# Altium PCB 轨道灯6W.PcbDoc
Units mm, origin at the board's own origin, x right, y up, seen from the top; angles counter-clockwise.
Board outline 40 x 40 mm, 2 copper layers (Top Layer, Bottom Layer); 6 components, 6 nets, 16 pads, 0 vias.
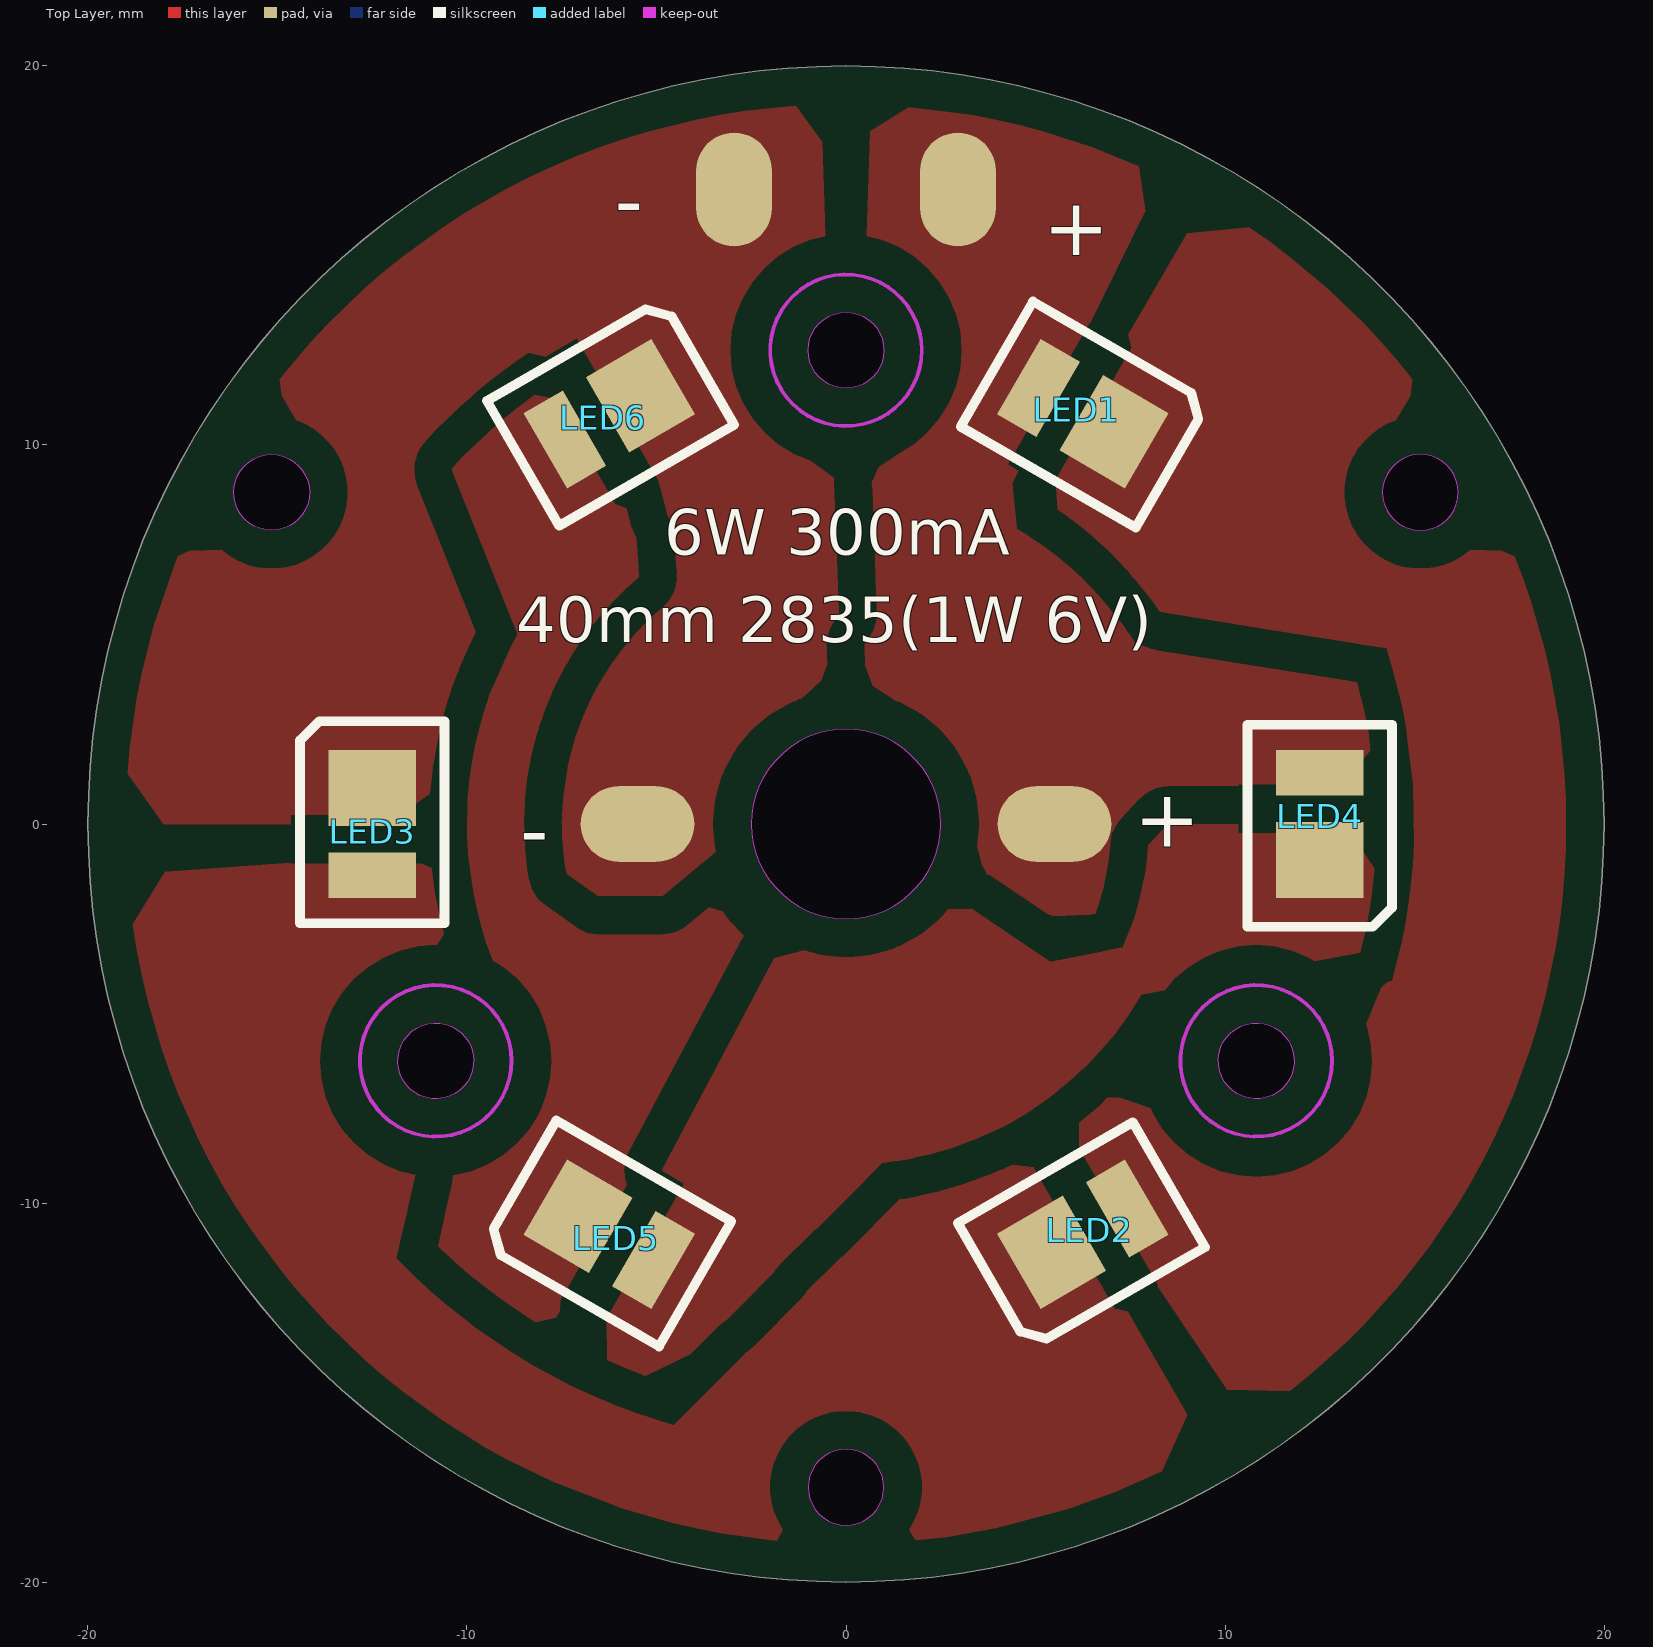
[diagram p0: Top Layer view]
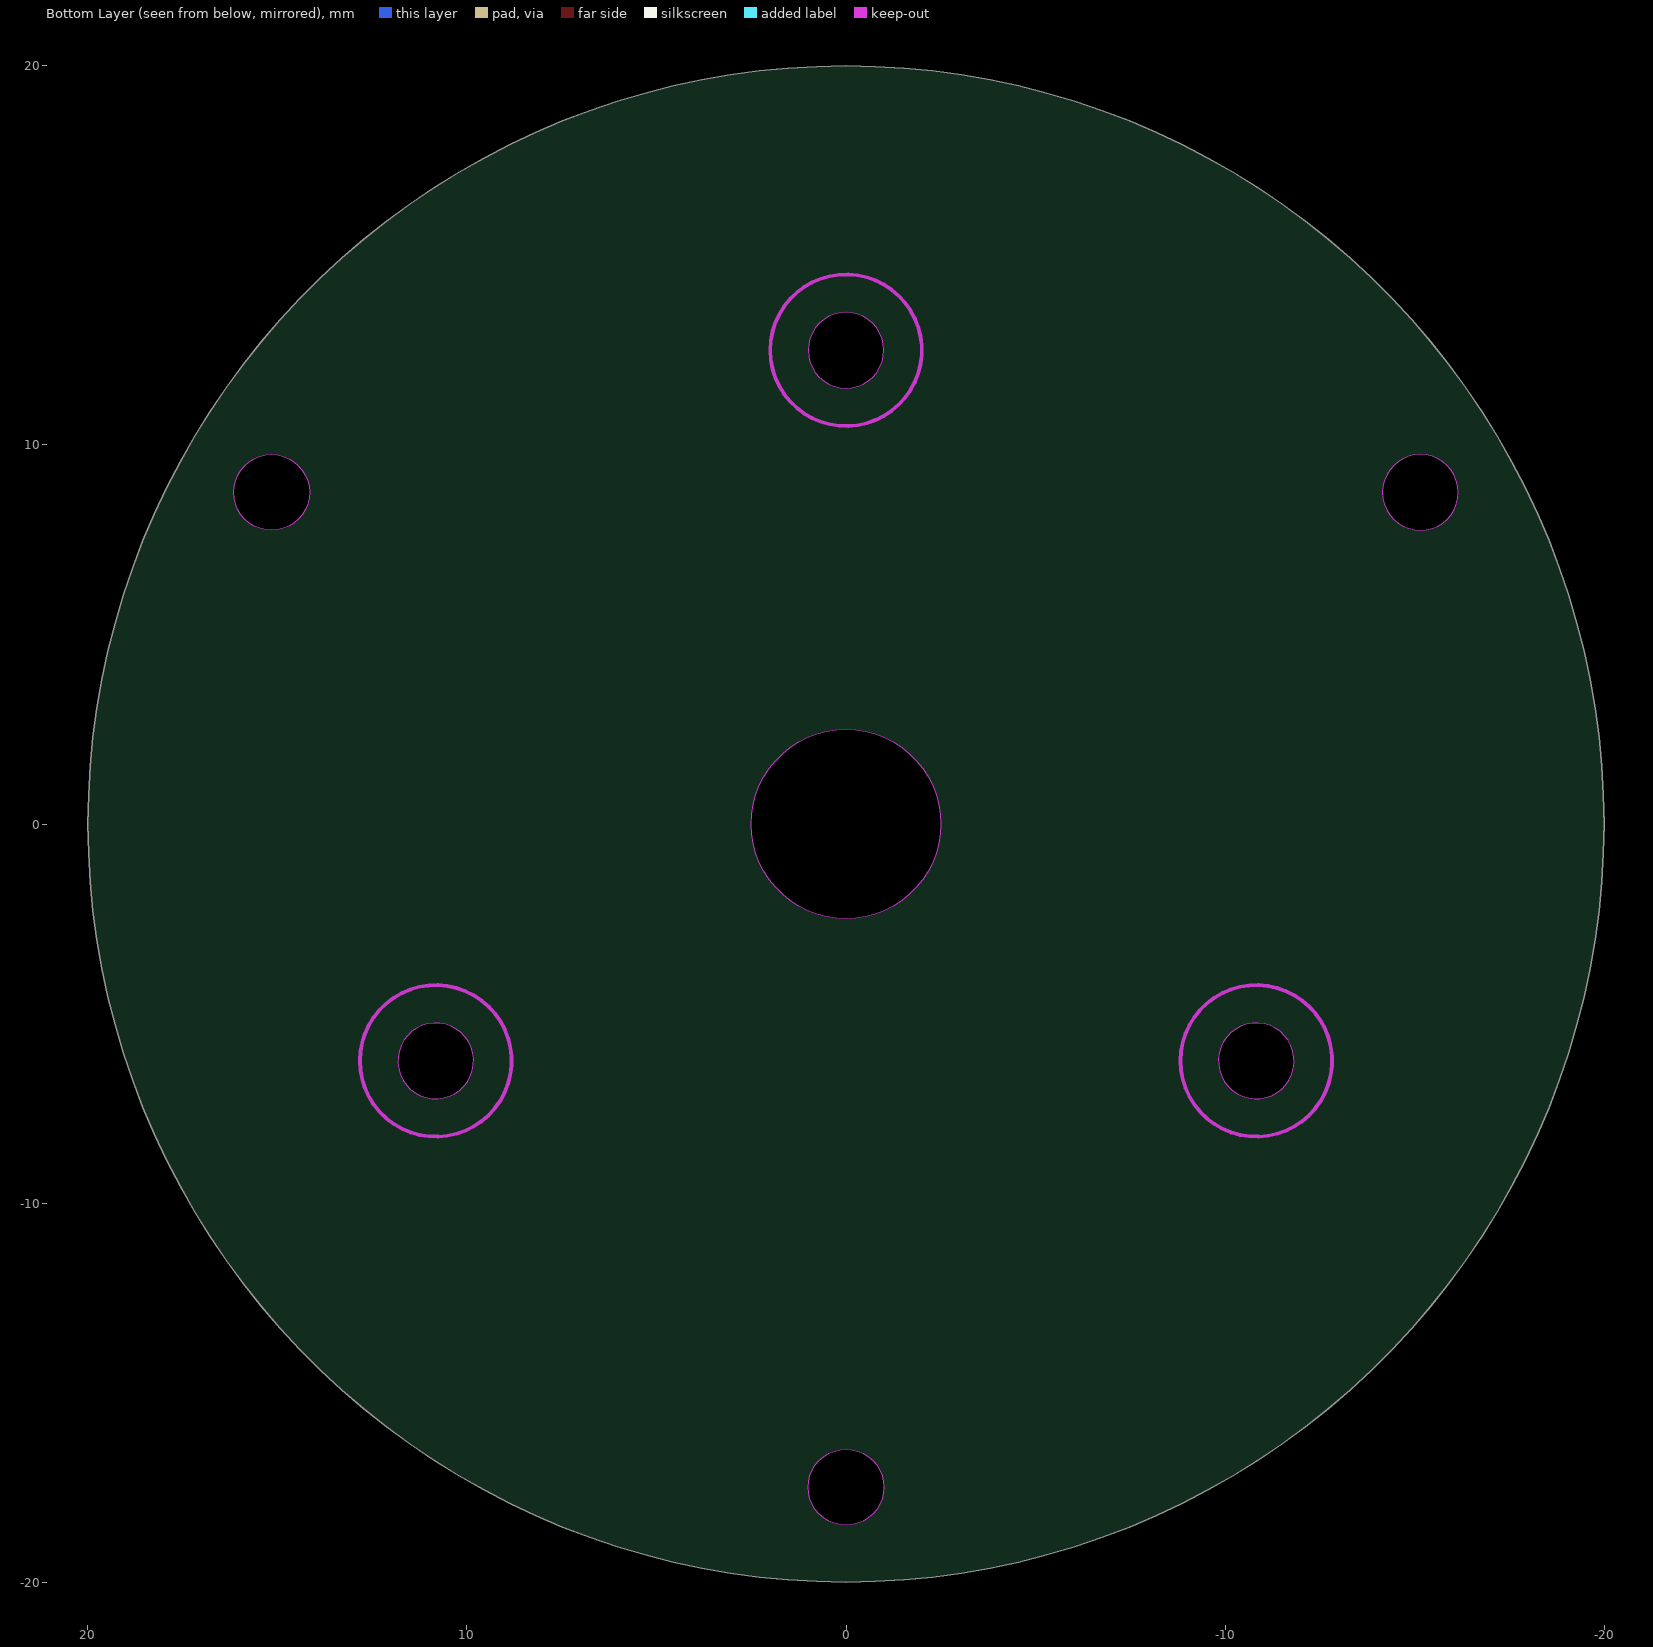
[diagram p1: Bottom Layer view, seen from below]

## Layer stack, top to bottom
Top Solder: solder mask 0.0102, Solder Resist, Dk 3.5
Top Layer: signal copper 0.0356
Dielectric 1: dielectric 0.32, FR-4, Dk 4.8
Bottom Layer: signal copper 0.0356
Bottom Solder: solder mask 0.0102, Solder Resist, Dk 3.5

## Board outline
-20,0 ccw(c0,0) 0,-20 ccw(c0,0) 20,0 ccw(c0,0) 0,20 ccw(c0,0)
cut-out: 9.959,-5.75 cw(c10.825,-6.25) 11.325,-5.384 cw(c10.825,-6.25) 11.691,-6.75 cw(c10.825,-6.25) 10.325,-7.116 cw(c10.825,-6.25)
cut-out: -9.959,-5.75 cw(c-10.825,-6.25) -10.325,-7.116 cw(c-10.825,-6.25) -11.691,-6.75 cw(c-10.825,-6.25) -11.325,-5.384 cw(c-10.825,-6.25)
cut-out: 0,11.5 cw(c0,12.5) -1,12.5 cw(c0,12.5) 0,13.5 cw(c0,12.5) 1,12.5 cw(c0,12.5)
cut-out: -1,-17.5 ccw(c0,-17.5) 0,-18.5 ccw(c0,-17.5) 1,-17.5 ccw(c0,-17.5) 0,-16.5 ccw(c0,-17.5)
cut-out: 14.155,8.75 ccw(c15.155,8.75) 15.155,7.75 ccw(c15.155,8.75) 16.155,8.75 ccw(c15.155,8.75) 15.155,9.75 ccw(c15.155,8.75)
cut-out: -15.155,7.75 cw(c-15.155,8.75) -16.155,8.75 cw(c-15.155,8.75) -15.155,9.75 cw(c-15.155,8.75) -14.155,8.75 cw(c-15.155,8.75)
cut-out: -2.5,0 ccw(c0,0) 0,-2.5 ccw(c0,0) 2.5,0 ccw(c0,0) 0,2.5 ccw(c0,0)

## Design rules (kind name [scope] priority, off if disabled: settings)
Clearance [INPolygon] p1: gap=1
PolygonConnect [All] p1: connectstyle=Direct reliefconductorwidth=0.254 reliefentries=4 polygonreliefangle="90 Angle" airgapwidth=0.254
RoutingVias [All] p1: holewidth=0.711 width=1.27 viastyle="Through Hole" minholewidth=0.711 minwidth=1.27 maxholewidth=0.711 maxwidth=1.27
SolderMaskExpansion [All] p1: expansion=0.102
UnpouredPolygon [All] p1: allowunpoured=FALSE
Width [All] p1: maxlimit=0.254 minlimit=0.254 preferedwidth=0.254
29 further rules are at their usual default settings.

## Components (designator, comment, footprint, x,y, rotation, side; value= is the part's Value field where it differs from the comment)
LED1 "LED2835" led2835 6.25,10.825 r330 top
LED2 "LED2835" led2835 6.25,-10.825 r210 top
LED3 "LED2835" led2835 -12.5,0 r90 top
LED4 "LED2835" led2835 12.5,0 r270 top
LED5 "LED2835" led2835 -6.25,-10.825 r150 top
LED6 "LED2835" led2835 -6.25,10.825 r30 top

## Footprints (in the part's own frame and the unit in brackets; to place one, negate y for a bottom-side part, rotate by r counter-clockwise, add the part's x,y. Pads: shape width x height; smd on the part's side, far side on the other; paste and mask are expansions set on the pad)
led2835 [mm]
  rect 1.2x2.3 smd: 1(-1.35,0)
  rect 2x2.3 smd: 2(0.95,0)
  silkscreen extent -2.62,-1.91 2.71,1.91

## Free pads (board coordinates)
  oval 2x3 smd: 0(2.952,16.742) 1(-2.952,16.742)
  oval 3x2 smd: 2(-5.5,0) 2(5.5,0)

## Nets (pads, with @x,y where several pads share a name; then routed paths per layer and width w, separated by ;. In a path a pad name is that pad's centre, name@x,y a point inside that pad or via, vN(x,y) a via of type N, cw(c..) or ccw(c..) an arc to the next point about the centre after c; other vN are vias at no path point)
GND: LED3.2 LED6.2 pad.1 pad.2@-5.5,0
NetLED1_2: LED1.2 LED2.1
NetLED2_2: LED2.2 LED3.1
NetLED4_2: LED4.2 LED5.1
NetLED5_2: LED5.2 LED6.1
VCC: LED1.1 LED4.1 pad.0 pad.2@5.5,0

## Polygon pours and split planes (outlines as drawn)
NetLED5_2 on Top Layer "Top Layer-No Net" (solid, remove dead copper, pour order 21): -7,-12.124 -2.5,-4.33 -2.351,-3.236 -2.677,-2.973 -3.064,-2.571 -3.316,-2.237 -3.464,-2 -4.494,-2.192 -7.048,-2.565 -8.371,-1.476 -8.417,-1.183 -8.495,-0.297 -8.495,0.297 -8.417,1.183 -8.314,1.767 -8.171,2.343 -7.987,2.907 -7.765,3.457 -7.505,3.991 -7.208,4.504 -6.877,4.996 -6.511,5.464 -6.114,5.905 -5.688,6.317 -5.464,6.511 -5.312,7.876 -7.549,11.192 -8.229,11.326 -8.619,11.032 -9.368,10.404 -9.725,10.071 -10.071,9.725 -10.404,9.368 -8.66,5 -8.829,4.695 -9.397,3.42 -9.511,3.09 -9.703,2.419 -9.781,2.079 -9.848,1.736 -9.945,1.045 -9.976,0.698 -9.994,-0.349 -9.945,-1.045 -9.781,-2.079 -9.703,-2.419 -9.511,-3.09 -9.135,-4.067 -8.988,-4.384 -9.526,-5.5 -10.825,-6.25 -10.113,-7.347 -11.15,-10.767 -10.767,-11.15 -9.963,-11.874 -9.543,-12.214 -9.111,-12.54 -8.667,-12.85 -8.214,-13.145 -7.5,-12.99
VCC on Top Layer "Top Layer-No Net" (solid, remove dead copper, pour order 19): 5.918,12.134 7.891,16.178 7.728,17.357 6.498,17.854 5.237,18.264 4.597,18.436 3.95,18.585 3.299,18.711 1.325,18.954 0.663,18.988 0.157,4.497 0.608,3.447 0.965,3.364 1.082,3.329 1.197,3.289 1.534,3.146 1.75,3.031 2.155,2.758 2.681,2.25 2.832,2.057 3.031,1.75 3.146,1.534 3.245,1.311 3.364,0.965 3.424,0.728 3.447,0.608 3.498,0.122 3.498,-0.122 3.447,-0.608 3.364,-0.965 3.654,-1.627 5.481,-2.44 6.578,-2.394 6.729,-1.929 6.847,-1.455 6.894,-1.216 6.962,-0.732 6.996,-0.244 8.479,0.593 13.467,0.942 13.923,1.463 13.787,2.431 13.694,2.911 13.584,3.387 13.458,3.859 7.632,4.769 7.281,5.29 6.894,5.785 6.474,6.252 6.252,6.474 6.022,6.688 5.541,7.092 5.29,7.281 4.769,7.632 4.5,7.794 4.384,8.988
GND on Top Layer "Top Layer-No Net" (solid, remove dead copper, pour order 17): -13,0 -18,0 -18.954,1.325 -18.896,1.986 -18.711,3.299 -18.585,3.95 -18.264,5.237 -17.616,7.118 -17.077,8.329 -16.454,9.5 -16.113,10.068 -15.752,10.625 -14.972,11.698 -14.12,12.713 -13.667,13.198 -12.713,14.12 -12.213,14.555 -11.698,14.972 -10.625,15.752 -10.068,16.113 -8.92,16.776 -8.329,17.077 -7.728,17.357 -7.118,17.616 -6.498,17.854 -5.871,18.07 -5.237,18.264 -3.95,18.585 -3.299,18.711 -2.644,18.815 -1.325,18.954 -0.628,17.989 -0.157,4.497 -0.608,3.447 -0.965,3.364 -1.197,3.289 -1.643,3.09 -1.855,2.968 -2.155,2.758 -2.601,2.342 -2.968,1.855 -3.09,1.643 -3.197,1.424 -3.289,1.197 -3.396,0.847 -3.466,0.487 -3.491,0.244 -3.498,-0.122 -3.447,-0.608 -3.424,-0.728 -4.835,-1.899 -6.533,-1.907 -7.386,-1.302 -7.459,-0.784 -7.482,-0.523 -7.495,-0.262 -7.495,0.262 -7.482,0.523 -7.427,1.044 -7.336,1.559 -7.133,2.318 -7.048,2.565 -6.852,3.051 -6.495,3.75 -6.218,4.194 -5.91,4.617 -5.574,5.018 -5.21,5.395 -4.821,5.745 -5,8.66 -7,12.124 -8.388,12.436 -8.817,12.135 -9.235,11.82 -9.642,11.491 -10.037,11.147 -10.42,10.79 -10.79,10.42 -11.147,10.037 -9.526,5.5 -9.712,5.164 -10.049,4.474 -10.199,4.121 -10.337,3.762 -10.462,3.399 -10.574,3.032 -10.673,2.661 -10.76,2.287 -10.833,1.91 -10.94,1.15 -10.973,0.767 -10.993,0.384 -11.5,0
NetLED4_2 on Top Layer "Top Layer-No Net" (solid, remove dead copper, pour order 13): -6.573,-12.361 -1.878,-3.532 -1.082,-3.329 -0.608,-3.447 0,-3.5 0.366,-3.481 0.847,-3.396 1.082,-3.329 1.424,-3.197 1.643,-3.09 2.057,-2.832 2.25,-2.681 2.518,-2.431 2.681,-2.25 3.316,-2.237 5.389,-3.635 7.308,-3.254 7.518,-2.736 7.608,-2.472 7.762,-1.935 7.878,-1.389 7.922,-1.113 7.98,-0.558 8.5,0 13.5,0 13.991,-0.489 13.966,-0.977 13.923,-1.463 13.864,-1.948 13.787,-2.431 13.694,-2.911 13.584,-3.387 7.794,-4.5 7.461,-5.033 7.092,-5.541 6.474,-6.252 6.022,-6.688 5.785,-6.894 5.29,-7.281 4.769,-7.632 4.5,-7.794 4.225,-7.947 3.661,-8.222 3.078,-8.457 2.481,-8.651 1.871,-8.803 1.563,-8.863 0.941,-8.951 -3.997,-13.938 -5.301,-14.565 -6.304,-14.16 -6.795,-13.931 -7.042,-13.244
NetLED2_2 on Top Layer "Top Layer-No Net" (solid, remove dead copper, pour order 9): 5.25,-9.093 8.75,-15.155 9,-15.588 8.329,-17.077 7.118,-17.616 5.871,-18.07 3.95,-18.585 2.644,-18.815 1.325,-18.954 0,-19 -0.663,-18.988 -1.986,-18.896 -3.299,-18.711 -3.95,-18.585 -4.597,-18.436 -5.871,-18.07 -7.728,-17.357 -8.92,-16.776 -9.5,-16.454 -10.625,-15.752 -11.698,-14.972 -12.213,-14.555 -12.713,-14.12 -13.667,-13.198 -14.555,-12.213 -14.972,-11.698 -15.752,-10.625 -16.113,-10.068 -16.454,-9.5 -16.776,-8.92 -17.077,-8.329 -17.616,-7.118 -17.854,-6.498 -18.07,-5.871 -18.436,-4.597 -18.585,-3.95 -18.711,-3.299 -18.815,-2.644 -17.956,-1.256 -11.472,-0.802 -10.94,-1.15 -10.893,-1.531 -10.833,-1.91 -10.76,-2.287 -10.673,-2.661 -10.574,-3.032 -10.337,-3.762 -10.199,-4.121 -11.869,-11.462 -11.462,-11.869 -11.041,-12.262 -10.606,-12.64 -9.698,-13.349 -8.744,-13.993 -8.25,-14.289 -7.233,-14.83 -6.711,-15.073 -6.181,-15.299 -5.643,-15.505 -4.548,-15.861 1.392,-9.903 1.736,-9.848 2.419,-9.703 3.09,-9.511 3.746,-9.272 4.384,-8.988
NetLED1_2 on Top Layer "Top Layer-No Net" (solid, remove dead copper, pour order 3): 6.5,11.258 9,15.588 10.625,15.752 11.168,15.371 11.698,14.972 12.713,14.12 13.667,13.199 14.12,12.713 14.555,12.213 14.972,11.698 15.371,11.168 16.113,10.068 16.454,9.5 17.077,8.329 17.357,7.728 17.617,7.118 17.854,6.498 18.07,5.871 18.436,4.597 18.585,3.95 18.815,2.644 18.954,1.325 18.988,0.663 18.988,-0.663 18.954,-1.325 18.896,-1.986 18.815,-2.644 18.711,-3.299 18.436,-4.597 18.264,-5.237 18.07,-5.871 17.617,-7.118 17.357,-7.728 17.077,-8.329 16.776,-8.92 16.454,-9.5 16.113,-10.068 15.371,-11.168 14.972,-11.698 14.555,-12.213 13.667,-13.199 13.199,-13.667 12.213,-14.555 11.698,-14.972 10.065,-14.923 6.151,-9.119 6.157,-7.88 6.691,-7.431 7.431,-6.691 7.88,-6.157 8.09,-5.878 8.48,-5.299 14.419,-4.135 14.672,-3.119 14.772,-2.605 14.854,-2.088 14.918,-1.568 14.963,-1.046 14.991,-0.523 14.963,1.046 14.772,2.605 14.672,3.119 14.419,4.135 14.266,4.635 8.29,5.592 8.09,5.878 7.431,6.691 6.947,7.193 6.428,7.66 6.157,7.88 5.878,8.09 5.592,8.29 5.5,9.526

## Keep-outs
Keep-Out Layer:
  circle w0.1: c10.825,-6.25 r2
  circle w0.1: c-10.825,-6.25 r2
  circle w0.1: c0,12.5 r2
  circle w0.1: c0,12.5 r2

## Silkscreen, mask and mechanical layers (free items; w line width, h text height)
Top Overlay:
  text "-" at -6.1,15.7 h1.52
  text "+" at 5.2,15 h1.52
  text "6W 300mA" at -4.8,7.1 h1.2
  text "40mm 2835(1W 6V)" at -8.7,4.8 h1.2
  text "+" at 7.6,-0.6 h1.52
  text "-" at -8.6,-0.9 h1.52
Mechanical 1:
  circle w0.1: c0,12.5 r1
  circle w0.1: c10.825,-6.25 r1
  circle w0.1: c-10.825,-6.25 r1
  circle w0.1: c15.155,8.75 r1
  circle w0.1: c0,0 r2.5
  circle w0.1: c-15.155,8.75 r1
  circle w0.1: c0,0 r20
  circle w0.1: c0,-17.5 r1